# Altium PCB PCB.PcbDoc
Units mm, origin at the board's own origin, x right, y up, seen from the top; angles counter-clockwise.
Board outline 60 x 10 mm, 2 copper layers (Top Layer, Bottom Layer); 4 components, 3 nets, 20 pads, 0 vias.
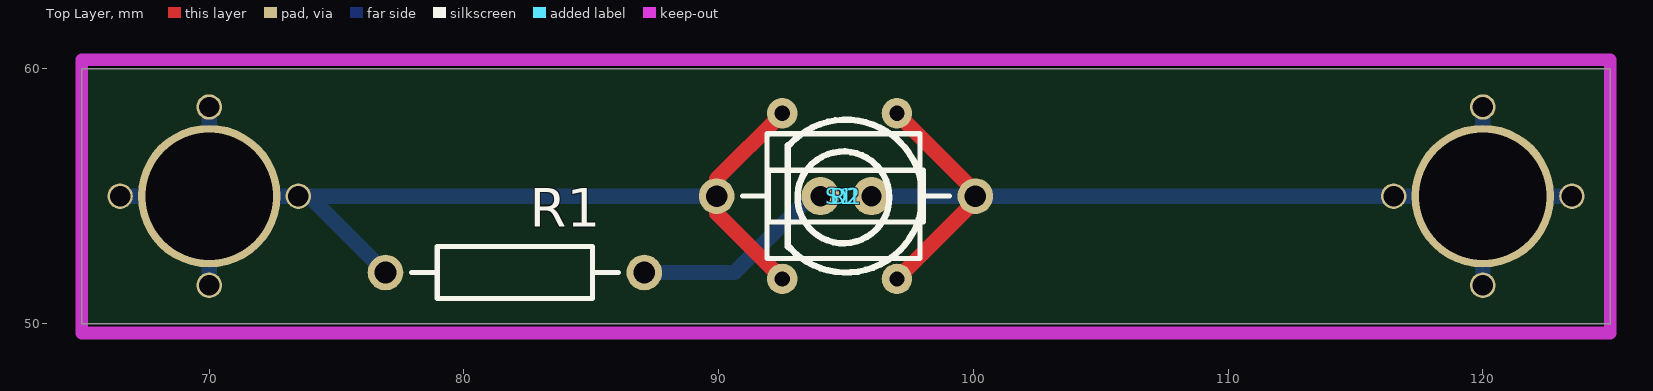
[diagram p0: Top Layer view]
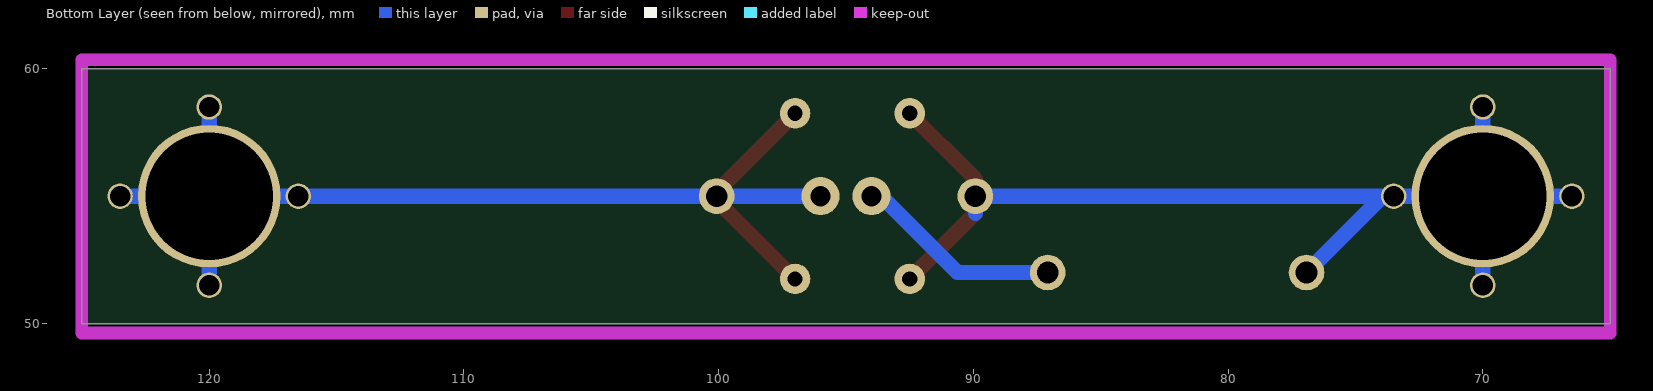
[diagram p1: Bottom Layer view, seen from below]

## Layer stack, top to bottom
Top Layer: signal copper 0.0356
Dielectric: dielectric 0.32, FR-4, Dk 4.8
Bottom Layer: signal copper 0.0356

## Board outline
125,60 125,50 65,50 65,60

## Design rules (kind name [scope] priority, off if disabled: settings)
Clearance Clearance_1 [IsRegion] p1: gap=1
Clearance [Not HasFootprint('LED')] p2: gap=0.6
PolygonConnect [All] p1: connectstyle=Relief reliefconductorwidth=0.254 reliefentries=4 polygonreliefangle="90 Angle"
RoutingVias [All] p1: holewidth=0.711 width=1.27 viastyle="Through Hole" minholewidth=0.711 minwidth=1.27 maxholewidth=0.711 maxwidth=1.27
SilkscreenOverComponentPads [All] p1: minsilkscreentomaskgap=0.254
SolderMaskExpansion SolderMaskExpansion_1 [HasFootprint('LED')] p1: expansion=0.15
SolderMaskExpansion [Not HasFootprint('LED')] p2: expansion=0.4
Width [All] p1: maxlimit=2 minlimit=0.6 preferedwidth=0.8
27 further rules are at their usual default settings.

## Components (designator, comment, footprint, x,y, rotation, side; value= is the part's Value field where it differs from the comment)
D1 "LED1_1" LED 96,55 r180 top
R1 "Res2" AXIAL-0.4 82,52 r180 top
R2 "Res2" AXIAL-0.4 95,55 r180 top
S1 "SW-PB" PushButton 97,58.25 r270 top

## Footprints (in the part's own frame and the unit in brackets; to place one, negate y for a bottom-side part, rotate by r counter-clockwise, add the part's x,y. Pads: shape width x height; smd on the part's side, far side on the other; paste and mask are expansions set on the pad)
AXIAL-0.4 [mm] "Axial Device, Thru-Hole; 2 Leads; 0.4 in Pin Spacing"
  round 1.4 hole 0.85: 1(-5.08,0) 2(5.08,0)
  silkscreen extent -4.06,-1.02 4.06,1.02
LED [mm]
  round 1.5 hole 0.8: A(0,0) K(2,0)
  silkscreen extent -2,-3 3.29,3
PushButton [mm]
  round 1.2 hole 0.6: 1(0,0) 1(6.5,0) 2(0,-4.5) 2(6.5,-4.5)
  silkscreen extent 0.8,-5.1 5.7,0.9

## Part data
D1: "Typical RED GaAs LED"
R1 R2: "Resistor"
S1: "Switch"

## Free pads (board coordinates)
  round 5.6 hole 5: 0(120,55) 1(70,55)
  round 1 hole 0.8: 2(70,58.5) 3(70,51.5) 4(73.5,55) 5(66.5,55) 6(120,58.5) 7(123.5,55) 8(120,51.5) 9(116.5,55)

## Nets (pads, with @x,y where several pads share a name; then routed paths per layer and width w, separated by ;. In a path a pad name is that pad's centre, name@x,y a point inside that pad or via, vN(x,y) a via of type N, cw(c..) or ccw(c..) an arc to the next point about the centre after c; other vN are vias at no path point)
IMA1: D1.A pad.0 pad.6 pad.7 pad.8 pad.9 R2.1 S1.1 | length 43.6
  Top Layer w0.6: S1.1@97,51.75 100.08,54.83 R2.1 100.08,55.17 S1.1@97,58.25
  Bottom Layer w0.6: D1.A R2.1 pad.9 pad.0 ; pad.8 pad.0 ; pad.6 pad.0 ; pad.7 pad.0
IMA2: pad.1 pad.2 pad.3 pad.4 pad.5 R1.2 R2.2 S1.2 | length 44.4
  Top Layer w0.6: S1.2@92.5,51.75 89.92,54.33 R2.2 89.92,55.67 S1.2@92.5,58.25
  Bottom Layer w0.6: pad.5 pad.1 ; pad.3 pad.1 ; pad.2 pad.1 ; R1.2 74,54.92 pad.4 ; R2.2@89.92,54.33 R2.2 pad.4 ; pad.1 pad.4
NetD1_K: D1.K R1.1 | length 8.2
  Bottom Layer w0.6: R1.1 90.629,52 93.629,55 D1.K

## Keep-outs
Keep-Out Layer:
  lines w0.5: 65,49.632 65,60.35 125,60.35 125,49.632 65,49.632